# Altium PCB Power Breakout.PcbDoc
Units mil, origin at the board's own origin, x right, y up, seen from the top; angles counter-clockwise.
Board outline 1615 x 980 mil, 2 copper layers (Top Layer, Bottom Layer); 11 components, 10 nets, 30 pads, 12 vias.
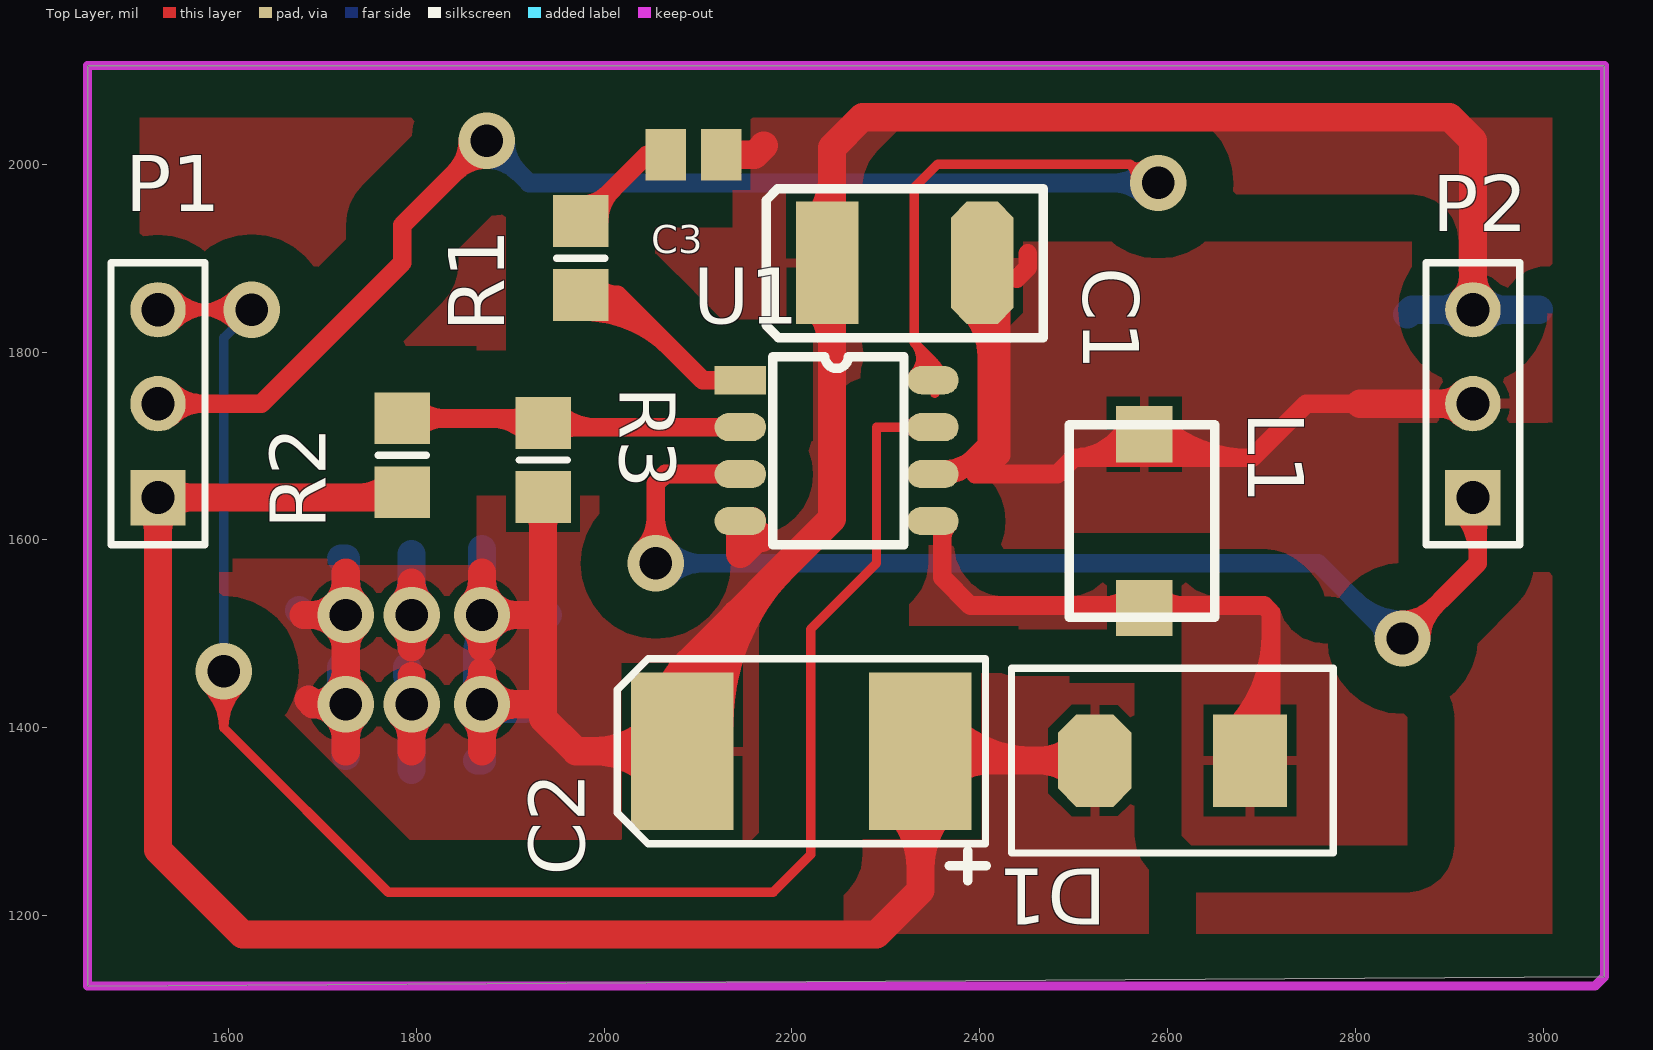
[diagram p0: Top Layer view]
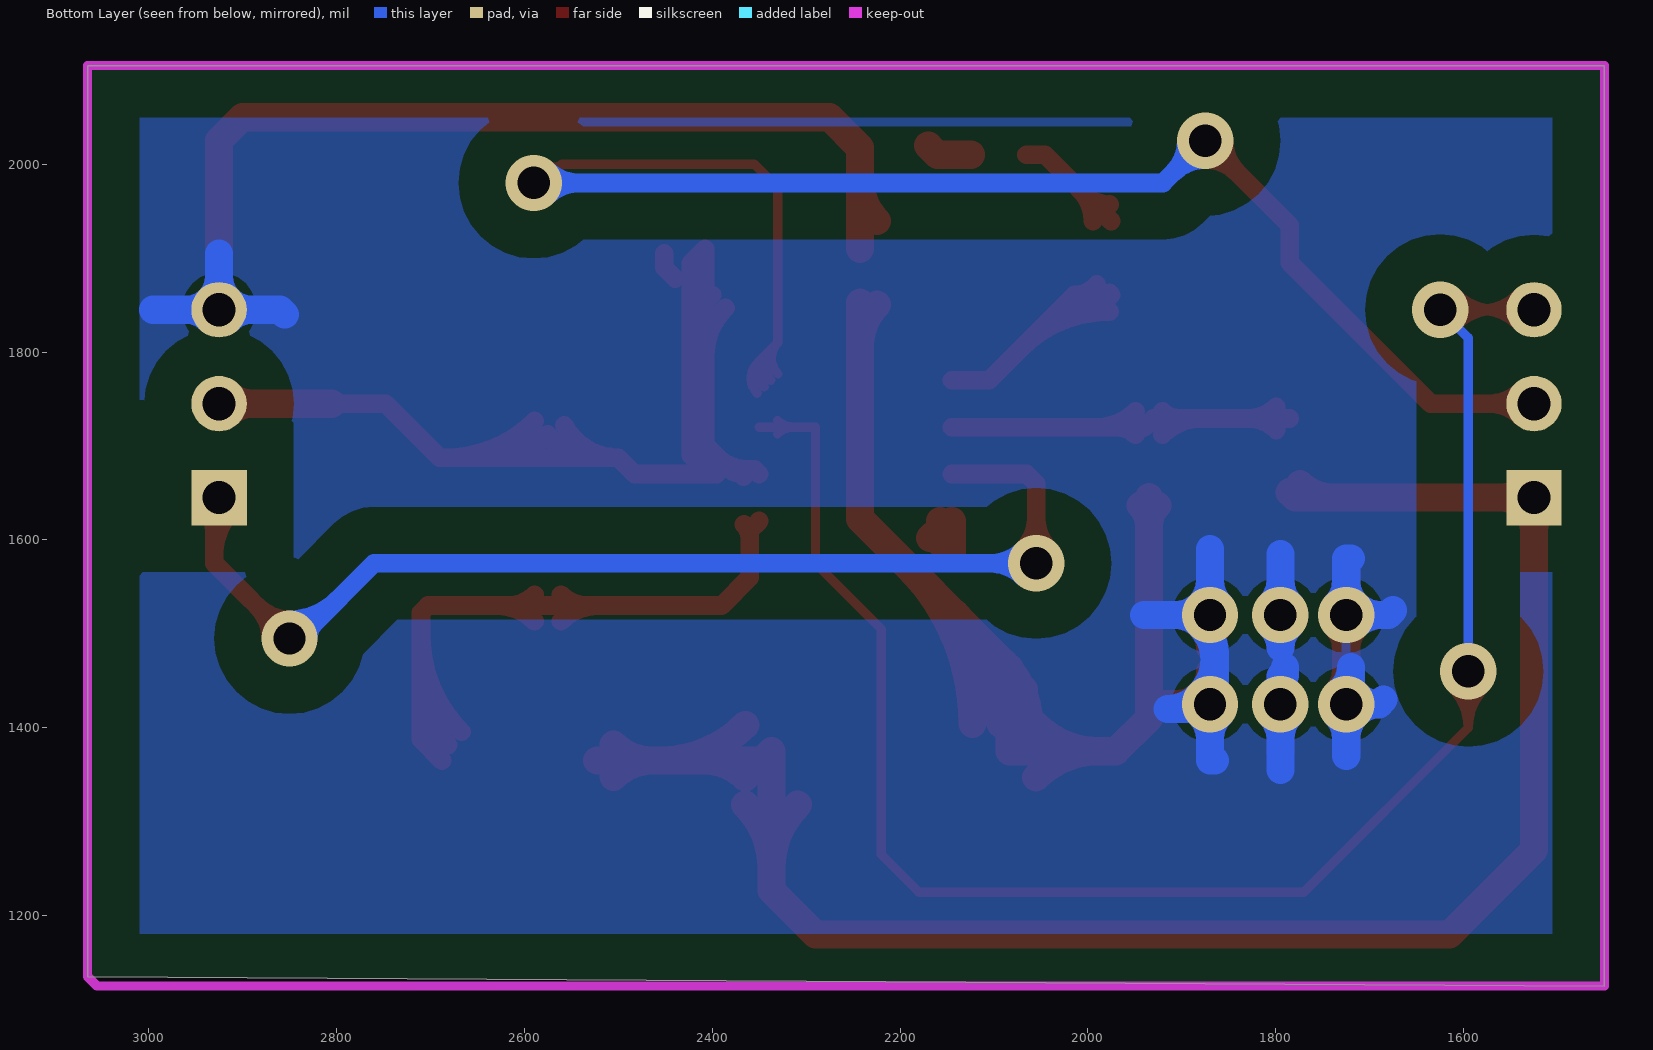
[diagram p1: Bottom Layer view, seen from below]

## Layer stack, top to bottom
Top Layer: signal copper 1.4
Dielectric: dielectric 12.6, FR-4, Dk 4.8
Bottom Layer: signal copper 1.4

## Board outline
1450,1125 1450,2105 3065,2105 3065,1135

## Design rules (kind name [scope] priority, off if disabled: settings)
Clearance Polygon [InPoly] p1: gap=50
Clearance [All] p2: gap=15
ComponentClearance [All] p1: gap=5 collisioncheckmode=3 verticalgap=10 showdistances=FALSE
PolygonConnect [All] p1: connectstyle=Relief reliefconductorwidth=10 reliefentries=4 polygonreliefangle="90 Angle" airgapwidth=10
RoutingVias [All] p1: holewidth=28 width=50 viastyle="Through Hole" minholewidth=28 minwidth=50 maxholewidth=28 maxwidth=50
SilkToSilkClearance [All] p1: silktosilkclearance=5
SilkscreenOverComponentPads [All] p1: minsilkscreentomaskgap=10
SolderMaskExpansion [All] p1: expansion=4
Width [All] p1: maxlimit=30 minlimit=10 preferedwidth=20
25 further rules are at their usual default settings.

## Components (designator, comment, footprint, x,y, rotation, side; value= is the part's Value field where it differs from the comment)
C1 "Cap" C0805 2095,2010 r180 top
C2 "220u" C2917 2210,1375 r180 top
C3 "47u" C2312 2320,1895 r180 top
D1 "D Schottky" ShottkeyDiode 2605,1365 r180 top
L1 "4.7u" Inductor 2575,1620 r270 top
P1 "Header 3" HDR1X3 1525,1645 r90 top
P2 "Header 3" HDR1X3 2925,1645 r90 top
R1 "47k" 6-0805_M 1975,1900 r90 top
R2 "309k" 6-0805_M 1785,1690 r90 top
R3 "100K" 6-0805_M 1935,1685 r270 top
U1 "LTC1308ACS8" SOP8_LTC1308A 2145,1770 r0 top

## Footprints (in the part's own frame and the unit in brackets; to place one, negate y for a bottom-side part, rotate by r counter-clockwise, add the part's x,y. Pads: shape width x height; smd on the part's side, far side on the other; paste and mask are expansions set on the pad)
6-0805_M [mm] "Chip Resistor, Body 2.0x1.2mm, IPC Low Density"
  rect 1.4x1.5 smd: 1(-1,0) 2(1,0)
  silkscreen extent 0,-0.65 0,0.65, body extent -1.07,-0.7 1.07,0.7, height 0.7
C0805 [mm] "Chip Capacitor, Body 2.0x1.3mm, IPC High Density"
  rect 1.1x1.4 smd: 1(-0.75,0) 2(0.75,0)
  body extent -1.1,-0.72 1.1,0.72, height 1.4
C2312 [mil]
  oct 66.93x130 smd: 1(-82.5,0)
  rect 66.93x130 smd: 2(82.5,0)
  silkscreen extent -148,-79 148,80
C2917 [mm]
  rect 2.77x4.25 smd: 1(-3.22,0) 2(3.22,0)
  silkscreen extent -5,-2.5 4.98,3.5
HDR1X3 [mm] "Connector; Header; 3 Position"
  rect 1.5x1.5 hole 0.9: 1(0,0)
  round 1.5 hole 0.9: 2(2.54,0) 3(5.08,0)
  silkscreen extent -1.27,-1.27 6.35,1.27
Inductor [mil]
  rect 60x60 smd: 1(-92.5,0) 2(92.5,0)
  silkscreen extent -103,-80 103,75
ShottkeyDiode [mm]
  rect 2x2.5 smd: A(-2.1,0)
  oct 2x2.5 smd: K(2.1,0)
  silkscreen extent -4.35,-2.5 4.35,2.5
SOP8_LTC1308A [mil]
  rect 55x30 smd: 1(0,0)
  oval 55x30 smd: 2(0,-50) 3(0,-100) 4(0,-150) 5(205,-150) 6(205,-100) 7(205,-50) 8(205,0)
  silkscreen extent 34,-175 174,25

## Part data
C1: "Capacitor"
C2 C3: library part "Cap Pol1", "Polarized Capacitor (Radial)"
D1: "Schottky Diode"
L1: library part Inductor, "Inductor"
P1 P2: "Header, 3-Pin"
R1 R2 R3: library part Res1, "Resistor"

## Via types
v1: diameter 60, hole 34.53, Top Layer to Bottom Layer, 12 vias

## Nets (pads, with @x,y where several pads share a name; then routed paths per layer and width w, separated by ;. In a path a pad name is that pad's centre, name@x,y a point inside that pad or via, vN(x,y) a via of type N, cw(c..) or ccw(c..) an arc to the next point about the centre after c; other vN are vias at no path point)
/SHDN: P2.1 U1.3 | length 1545.8
  Top Layer w20: v1@2040.86,1589.14 ccw(c2006.72,1623.28) 2055,1623.28 ccw(c2103.28,1623.28) v1@2069.14,1589.14 ; v1(2055,1575) 2055,1660 2065,1670 U1.3 ; v1(2850,1495) 2930,1575 2930,1640 P2.1 ; v1@2850,1515 ccw(c2850,1563.28) 2884.14,1529.14 ccw(c2918.28,1495) v1@2870,1495 ; P2.1@2911.19,1631.19 cw(c2865.79,1585.79) 2930,1585.79 ; 2930,1609.93 cw(c2960.07,1609.93) P2.1@2938.81,1631.19
  Bottom Layer w20: v1(2055,1575) 2760,1575 v1@2830,1505 ; v1@2069.14,1560.86 cw(c2103.28,1526.72) 2103.28,1575 cw(c2103.28,1623.28) v1@2069.14,1589.14 ; 2798.79,1536.21 ccw(c2850,1587.43) v1@2850,1515 ; 2822.93,1512.07 cw(c2805.86,1495) v1@2830,1495
GND: C1.1 C2.2 C3.2 P2.3 R3.2 U1.4 | length 6408.7
  Top Layer w30: 1680,1520 v1(1725,1520) ; 1685.31,1430 1690.31,1425 ; v1@1714.07,1414.73 ccw(c1690.31,1392.4) 1690.31,1425 ; v1@1714.07,1435.27 cw(c1690.31,1457.6) 1690.31,1425 ; v1@1714.39,1414.39 cw(c1688.79,1388.79) 1725,1388.79 cw(c1761.21,1388.79) v1@1735.61,1414.39 ; v1@1714.39,1435.61 ccw(c1688.79,1461.21) 1725,1461.21 ccw(c1761.21,1461.21) v1@1735.61,1435.61 ; v1@1720,1420 v1(1725,1425) ; v1@1720,1525 v1(1725,1520) ; 1725,1375 v1(1725,1425) ; 1725,1565 v1(1725,1520) ; v1@1735.61,1509.39 ccw(c1761.21,1483.79) 1725,1483.79 ccw(c1688.79,1483.79) 1714.39,1509.39 ccw(c1688.79,1483.79) 1688.79,1520 ccw(c1688.79,1556.21) 1714.39,1530.61 ccw(c1688.79,1556.21) 1725,1556.21 ccw(c1761.21,1556.21) v1@1735.61,1530.61 ; v1@1784.39,1414.39 cw(c1758.79,1388.79) 1795,1388.79 cw(c1831.21,1388.79) v1@1805.61,1414.39 ; v1@1784.73,1509.07 cw(c1762.4,1485.31) 1795,1485.31 ; v1@1784.73,1530.93 ccw(c1762.4,1554.69) 1795,1554.69 ; 1795,1375 v1(1795,1425) 1795,1455 ; v1@1805.27,1509.07 ccw(c1827.6,1485.31) 1795,1485.31 ; v1@1805.27,1530.93 cw(c1827.6,1554.69) 1795,1554.69 ; v1@1859.39,1414.39 cw(c1833.79,1388.79) 1870,1388.79 cw(c1906.21,1388.79) 1880.61,1414.39 cw(c1906.21,1388.79) 1906.21,1425 cw(c1906.21,1461.21) v1@1880.61,1435.61 ; v1@1859.39,1530.61 ccw(c1833.79,1556.21) 1870,1556.21 ccw(c1906.21,1556.21) 1880.61,1530.61 ccw(c1906.21,1556.21) 1906.21,1520 ccw(c1906.21,1483.79) v1@1880.61,1509.39 ; v1@1859.73,1435.93 ccw(c1837.4,1459.69) 1870,1459.69 ; v1@1859.73,1509.07 cw(c1837.4,1485.31) 1870,1485.31 ; 1870,1375 v1(1870,1425) ; 1870,1565 v1(1870,1520) ; v1@1880.27,1435.93 cw(c1902.6,1459.69) 1870,1459.69 ; v1@1880.27,1509.07 ccw(c1902.6,1485.31) 1870,1485.31 ; 1920,1425 v1(1870,1425) ; R3.2@1926.12,1636.75 cw(c1904.68,1615.31) 1935,1615.31 cw(c1965.32,1615.31) R3.2@1943.88,1636.75 ; 1930,1520 v1(1870,1520) ; R3.2 1935,1410 1970,1375 C2.2 2083.23,1463.23 ; C2.2@2055.28,1347.05 ccw(c1987.8,1279.57) 1987.8,1375 ccw(c1987.8,1470.43) C2.2@2055.28,1402.95 ; C2.2@2062.76,1404.13 cw(c2156,1404.13) 2090.07,1470.07 ; C2.2@2068.14,1440.67 ccw(c2058.82,1463.23) 2083.23,1463.23 ; C2.2@2092.76,1404.13 cw(c2258.42,1404.13) 2141.28,1521.28 ; C2.2@2098.32,1440.67 cw(c2107.63,1463.23) 2083.23,1463.23 ; C2.2@2122.76,1404.13 cw(c2360.85,1404.13) 2192.49,1572.49 ; C1.1 2160,2010 2170,2020 ; U1.4 2145,1585 ; 2148.02,1601.98 2161.98,1601.98 ; U1.4@2157.5,1620 cw(c2114.31,1615.69) 2145,1585 ; C3.2@2224.44,1850.41 cw(c2180.85,1806.82) 2242.5,1806.82 ; C3.2@2224.44,1939.59 ccw(c2180.85,1983.18) 2242.5,1983.18 ; C3.2@2242.5,1852.5 2242.5,1622.5 2083.23,1463.23 ; C3.2@2242.5,1910 2242.5,2017.5 2275,2050 2900,2050 2925,2025 P2.3 ; P2.3@2914.73,1855.27 ccw(c2889.93,1880.07) 2925,1880.07 ccw(c2960.07,1880.07) P2.3@2935.27,1855.27 ; 1690.31,1425 v1(1725,1425) ; v1(1725,1425) v1(1725,1520) ; 1795,1485.31 v1(1795,1520) 1795,1554.69 ; v1(1870,1425) 1870,1459.69 ; 1870,1485.31 v1(1870,1520) ; 2145,1585 2161.98,1601.98 ; 2161.98,1601.98 2165,1605 2168.02,1601.98 2161.98,1601.98
  Bottom Layer w30: 1675,1525 1680,1520 v1(1725,1520) 1725,1580 1720,1580 ; 1685.31,1430 1690.31,1425 ; v1@1714.07,1414.73 ccw(c1690.31,1392.4) 1690.31,1425 ; v1@1714.07,1435.27 cw(c1690.31,1457.6) 1690.31,1425 ; v1@1714.39,1414.39 cw(c1688.79,1388.79) 1725,1388.79 cw(c1761.21,1388.79) v1@1735.61,1414.39 ; v1@1714.39,1509.39 ccw(c1688.79,1483.79) 1688.79,1520 ccw(c1688.79,1556.21) 1714.39,1530.61 ccw(c1688.79,1556.21) 1725,1556.21 ccw(c1761.21,1556.21) v1@1735.61,1530.61 ; 1725,1370 v1(1725,1425) ; v1@1733.92,1437.06 cw(c1754.37,1464.69) 1720,1464.69 1720,1430 v1(1725,1425) ; v1@1784.39,1414.39 cw(c1758.79,1388.79) 1795,1388.79 cw(c1831.21,1388.79) v1@1805.61,1414.39 ; v1@1784.39,1530.61 ccw(c1758.79,1556.21) 1795,1556.21 ccw(c1831.21,1556.21) v1@1805.61,1530.61 ; v1@1784.73,1509.07 cw(c1762.4,1485.31) 1795,1485.31 ; 1795,1355 v1(1795,1425) 1795,1455 1790,1460 ; 1795,1585 v1(1795,1520) 1795,1485.31 ; v1@1802.61,1437.92 cw(c1815.62,1460) 1790,1460 ; v1@1803.92,1437.06 cw(c1824.37,1464.69) 1790,1464.69 1790,1460 ; v1@1805.27,1509.07 ccw(c1827.6,1485.31) 1795,1485.31 ; v1@1859.39,1414.39 cw(c1833.79,1388.79) 1870,1388.79 cw(c1906.21,1388.79) v1@1880.61,1414.39 ; v1@1859.39,1530.61 ccw(c1833.79,1556.21) 1870,1556.21 ccw(c1906.21,1556.21) 1880.61,1530.61 ccw(c1906.21,1556.21) 1906.21,1520 ccw(c1906.21,1483.79) 1880.61,1509.39 ccw(c1918.28,1471.72) 1865,1471.72 ; 1865,1365 1870,1365 v1(1870,1425) ; 1865,1473.28 ccw(c1918.28,1473.28) v1@1880.61,1435.61 ; 1865,1480 cw(c1900,1480) v1@1879,1508 ; 1865,1480.31 1865,1430 v1(1870,1425) ; 1870,1590 v1(1870,1520) 1940,1520 ; v1@1881.13,1435.05 ccw(c1915,1465.62) 1915,1420 1875,1420 v1(1870,1425) ; 2855,1840 2860,1845 P2.3 ; P2.3@2914.73,1834.73 ccw(c2889.93,1809.93) 2889.93,1845 ccw(c2889.93,1880.07) 2914.73,1855.27 ccw(c2889.93,1880.07) 2925,1880.07 ccw(c2960.07,1880.07) 2935.27,1855.27 ccw(c2960.07,1880.07) 2960.07,1845 ccw(c2960.07,1809.93) P2.3@2935.27,1834.73 ; 2925,1905 P2.3 ; 2995,1845 P2.3 ; 1690.31,1425 v1(1725,1425)
LBI: P1.3 U1.7 | length 2303.5
  Top Layer w10: P1.3 v1(1625,1845) ; P1.3@1535.27,1834.73 cw(c1560.07,1809.93) 1560.07,1845 cw(c1560.07,1880.07) P1.3@1535.27,1855.27 ; P1.3@1542.34,1827.66 cw(c1584.21,1785.79) 1584.21,1845 cw(c1584.21,1904.21) P1.3@1542.34,1862.34 ; v1@1577.4,1442.25 cw(c1535.51,1400) 1595,1400 ; v1@1584.44,1449.35 cw(c1559.3,1424) 1595,1424 cw(c1630.7,1424) v1@1605.56,1449.35 ; v1(1595,1460) 1595,1400 ; v1@1607.32,1827.32 ccw(c1564.64,1784.64) 1564.64,1845 ccw(c1564.64,1905.36) v1@1607.32,1862.68 ; v1@1612.6,1442.25 ccw(c1654.49,1400) 1595,1400 ; v1@1614.39,1834.39 ccw(c1588.79,1808.79) 1588.79,1845 ccw(c1588.79,1881.21) v1@1614.39,1855.61 ; U1.7@2330.43,1712.93 ccw(c2313.36,1695.86) 2313.36,1720 ccw(c2313.36,1744.14) U1.7@2330.43,1727.07 ; U1.7 2290,1720 2290,1575 2220,1505 2220,1265 2180,1225 1770,1225 1595,1400
  Bottom Layer w10: v1(1595,1460) 1595,1815 v1(1625,1845)
LBO: P1.2 U1.8 | length 2213.2
  Top Layer w10: U1.8@2330.3,1776.94 ccw(c2313.32,1793.32) 2330,1810 ; 2337.2,1802.8 cw(c2320.65,1786.25) U1.8@2337.5,1770 ; U1.8@2344,1778 ccw(c2335,1790) 2350,1790 ; 2344.4,1795.6 cw(c2327.98,1779.18) U1.8@2344.7,1763.06 ; U1.8 2350,1790 ; 2351.6,1788.4 cw(c2335.31,1772.11) U1.8@2351.9,1756.12 ; U1.8@2356,1778 cw(c2365,1790) 2350,1790 ; v1@2565.29,1983.82 ccw(c2546.69,1986.69) 2560,2000 ; v1@2574.12,1999.31 cw(c2567.44,2007.44) 2560,2000 ; v1@2580,1980 2560,2000 ; v1(2590,1980) v1@2600,1980 ; 2330,1810 2350,1790 ; 2330,1810 2330,1975 2355,2000 2560,2000
  Top Layer w20: P1.2 1635,1745 1785,1895 1785,1935 v1(1875,2025) ; P1.2@1538.81,1731.19 cw(c1572.14,1697.86) 1572.14,1745 cw(c1572.14,1792.14) P1.2@1538.81,1758.81 ; v1@1855,2025 cw(c1806.72,2025) 1840.86,1990.86 cw(c1875,1956.72) v1@1875,2005
  Bottom Layer w20: v1@1875,2005 cw(c1875,1956.72) 1909.14,1990.86 cw(c1943.28,2025) v1@1895,2025 ; v1@1885,2015 1920,1980 v1(2590,1980) ; v1@1885,2025 v1@1885,2030 ; v1@2575.86,1965.86 ccw(c2541.72,1931.72) 2541.72,1980 ccw(c2541.72,2028.28) v1@2575.86,1994.14
NetC1_2: C1.2 R1.2 | length 186.3
  Top Layer w20: R1.2 2045.63,2010 C1.2 ; R1.2@1976.97,1956.93 ccw(c1976.97,1994.57) 2003.58,1967.95 ; R1.2@1994.53,1939.37 cw(c2041.67,1939.37) 2008.34,1972.71
NetR1_1: R1.1 U1.1 | length 432.6
  Top Layer w20: R1.1 2014.37,1860.63 ; R1.1@1976.97,1843.07 cw(c1976.97,1710.38) 2070.79,1804.21 ; R1.1@1976.97,1863.07 cw(c1976.97,1778.67) 2036.65,1838.35 ; R1.1@1990.48,1849.41 cw(c2014.37,1829.58) 2014.37,1860.63 ; R1.1@1990.48,1871.85 ccw(c2014.37,1891.68) 2014.37,1860.63 ; U1.1 2105,1770 2014.37,1860.63
NetR2_2: R2.2 R3.1 U1.2 | length 563.6
  Top Layer w20: R2.2 1930,1729.37 R3.1 1939.37,1720 U1.2 ; R2.2@1799.38,1716.95 cw(c1829.36,1686.98) 1829.36,1729.37 cw(c1829.36,1771.76) R2.2@1799.38,1741.79 ; 1878.57,1729.37 cw(c1878.57,1669.91) R3.1@1920.62,1711.95 ; 1902.71,1729.37 ccw(c1902.71,1754.69) R3.1@1920.62,1736.79 ; R3.1@1949.38,1711.95 cw(c1968.81,1692.53) 1968.81,1720 ; R3.1@1949.38,1736.79 ccw(c1989.91,1777.31) 1989.91,1720
SW: D1.A L1.2 U1.5 | length 957.5
  Top Layer w20: U1.5 2360,1610 2360,1560 2390,1530 2702.5,1530 2710,1522.5 2710,1387.32 D1.A ; 2360,1601.89 cw(c2380.61,1601.89) U1.5@2366.04,1616.46 ; 2520.68,1530 cw(c2520.68,1473.18) L1.2@2560.86,1513.36 ; 2532.75,1530 ccw(c2532.75,1569.75) L1.2@2560.86,1541.64 ; L1.2@2589.14,1513.36 cw(c2629.32,1473.18) 2629.32,1530 ; L1.2@2589.14,1541.64 ccw(c2617.25,1569.75) 2617.25,1530 ; D1.A@2666.91,1395.61 ccw(c2562.88,1499.64) 2710,1499.64 ; D1.A@2681.05,1381.47 ccw(c2611.17,1451.35) 2710,1451.35
VIN: C3.1 L1.1 P2.2 U1.6 | length 1844.6
  Top Layer w20: U1.6 2355,1675 2381.14,1675 ; U1.6@2362.5,1675 ccw(c2362.5,1720) 2394.32,1688.18 ; U1.6@2365.54,1673.97 ccw(c2372.75,1683.39) 2381.14,1675 ; U1.6@2366.67,1667.24 cw(c2381.14,1657.63) 2381.14,1675 ; C3.1@2400.05,1861.01 cw(c2345.02,1805.99) 2422.84,1805.99 ; 2407.5,1794.75 ccw(c2333.78,1794.75) 2385.91,1846.87 cw(c2296.74,1757.7) 2422.84,1757.7 ; 2407.5,1818.89 cw(c2447.08,1818.89) C3.1@2419.09,1846.87 ; 2439.23,1878.27 2450.96,1890 2450.96,1905 ; 2533.33,1687.5 ccw(c2533.33,1734.72) L1.1 ccw(c2635.36,1772.86) 2635.36,1687.5 ; L1.1@2557.35,1721.91 cw(c2500,1752.5) 2500,1687.5 ; L1.1@2589.14,1726.64 ccw(c2683.64,1821.14) 2683.64,1687.5 ; 2805,1745 2747.5,1745 2690,1687.5 2500,1687.5 ; 2381.14,1675 2407.5,1701.36 2407.5,1910 2422.84,1894.66 2422.84,1697.84 ; 2400,1670 2395,1670 2400,1675 ; 2400,1670 2482.5,1670 2500,1687.5 ; 2400,1670 2400,1675 ; 2400,1675 2400,1685 2404.75,1689.75 2414.75,1689.75 ; 2400,1675 2414.75,1689.75 ; 2414.75,1689.75 2422.84,1689.75 2422.84,1697.84 ; 2414.75,1689.75 2422.84,1697.84
  Top Layer w30: 2805,1745 P2.2 ; P2.2@2914.73,1734.73 ccw(c2889.93,1709.93) 2889.93,1745 ccw(c2889.93,1780.07) P2.2@2914.73,1755.27
VOUT: C2.1 D1.K P1.1 R2.1 | length 2385
  Top Layer w30: P1.1@1514.73,1634.73 cw(c1489.93,1609.93) 1525,1609.93 cw(c1560.07,1609.93) 1535.27,1634.73 cw(c1560.07,1609.93) 1560.07,1645 cw(c1560.07,1680.07) P1.1@1535.27,1655.27 ; 1739.12,1645 ccw(c1739.12,1694.54) R2.1@1774.15,1659.51 ; R2.1 1779.37,1645 P1.1 1525,1270 1615,1180 2290,1180 2336.77,1226.77 C2.1 2346.77,1365 D1.K ; C2.1@2308.82,1317.92 cw(c2241.34,1250.44) 2336.77,1250.44 cw(c2432.2,1250.44) C2.1@2364.72,1317.92 ; C2.1@2364.72,1347.05 cw(c2408.06,1303.71) 2408.06,1365 ; C2.1@2364.72,1402.95 ccw(c2456.34,1494.57) 2456.34,1365 ; D1.K@2505.09,1347.77 ccw(c2463.49,1306.17) 2463.49,1365 ccw(c2463.49,1423.83) D1.K@2505.09,1382.23

## Polygon pours and split planes (outlines as drawn)
VIN on Top Layer "Switch" (solid, pour order 2): 2325,1825 2325,1540 3040,1540 3045,1545 3045,1820 3045,1815
SW on Top Layer "Switch" (solid, pour order 6): 2320,1645 2325,1640 2325,1525 2325,1505 2615,1505 2615,1285 2620,1280 2625,1275 2855,1275 2855,1634.51 2845.47,1644.04
VOUT on Top Layer "Switch" (solid, pour order 8): 2255,1520 2255,1150 2260,1155 2580,1155 2580,1490 2555,1515
VIN on Top Layer "Switch" (solid, remove dead copper, pour order 14): 2395.31,1917.27 2395.31,1457.27 3110.31,1457.27 3110.31,1917.27
GND on Top Layer "Switch" (solid, pour order 16): 1435.22,2100.47 1435.22,1120.47 1445.22,1130.47 3050.22,1130.47 3050.22,2100.47
GND on Bottom Layer "Switch" (solid, pour order 18): 1450,2105 1450,1125 3055,1125 3060,1130 3065,1135 3065,2105

## Keep-outs
Keep-Out Layer:
  lines w10: 1450,1125 3055,1125 3065,1135 3065,2105 1450,2105 1450,1125